# Altium PCB PCB2.PcbDoc
Units mm, origin at the board's own origin, x right, y up, seen from the top; angles counter-clockwise.
Board outline 140 x 90 mm, 2 copper layers (Top Layer, Bottom Layer); 45 components, 39 nets, 156 pads, 21 vias.
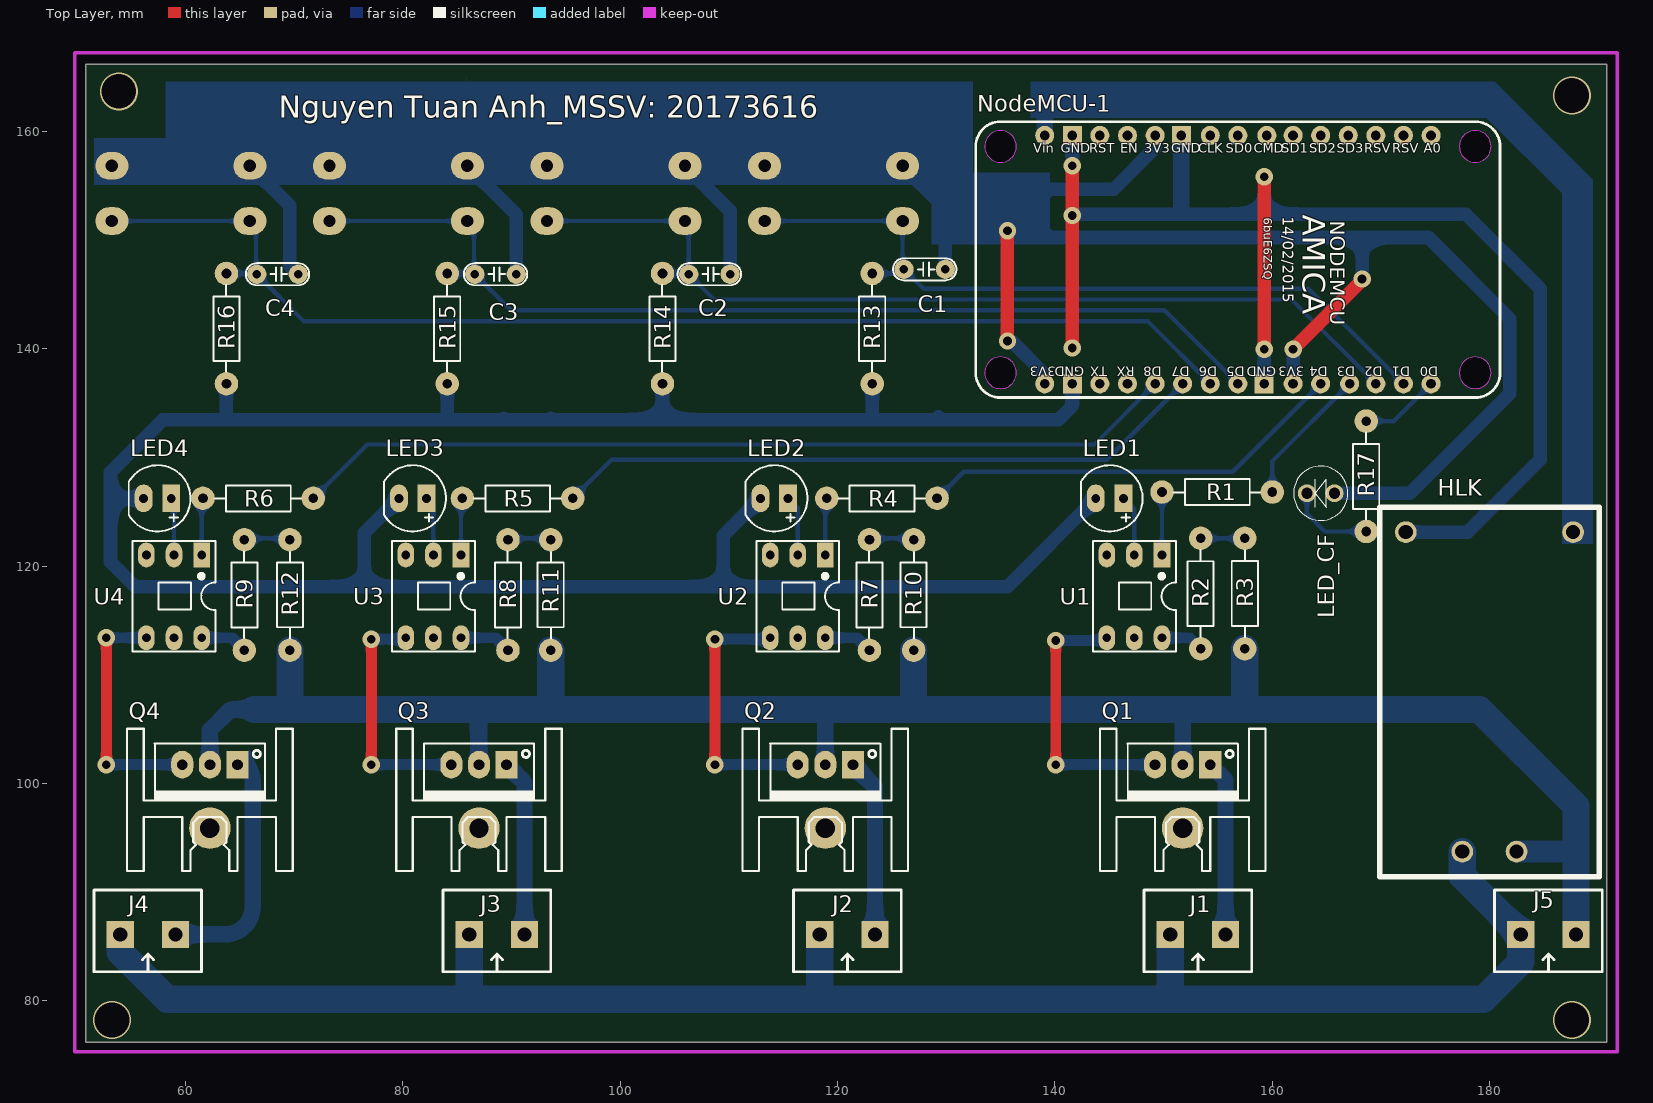
[diagram p0: Top Layer view]
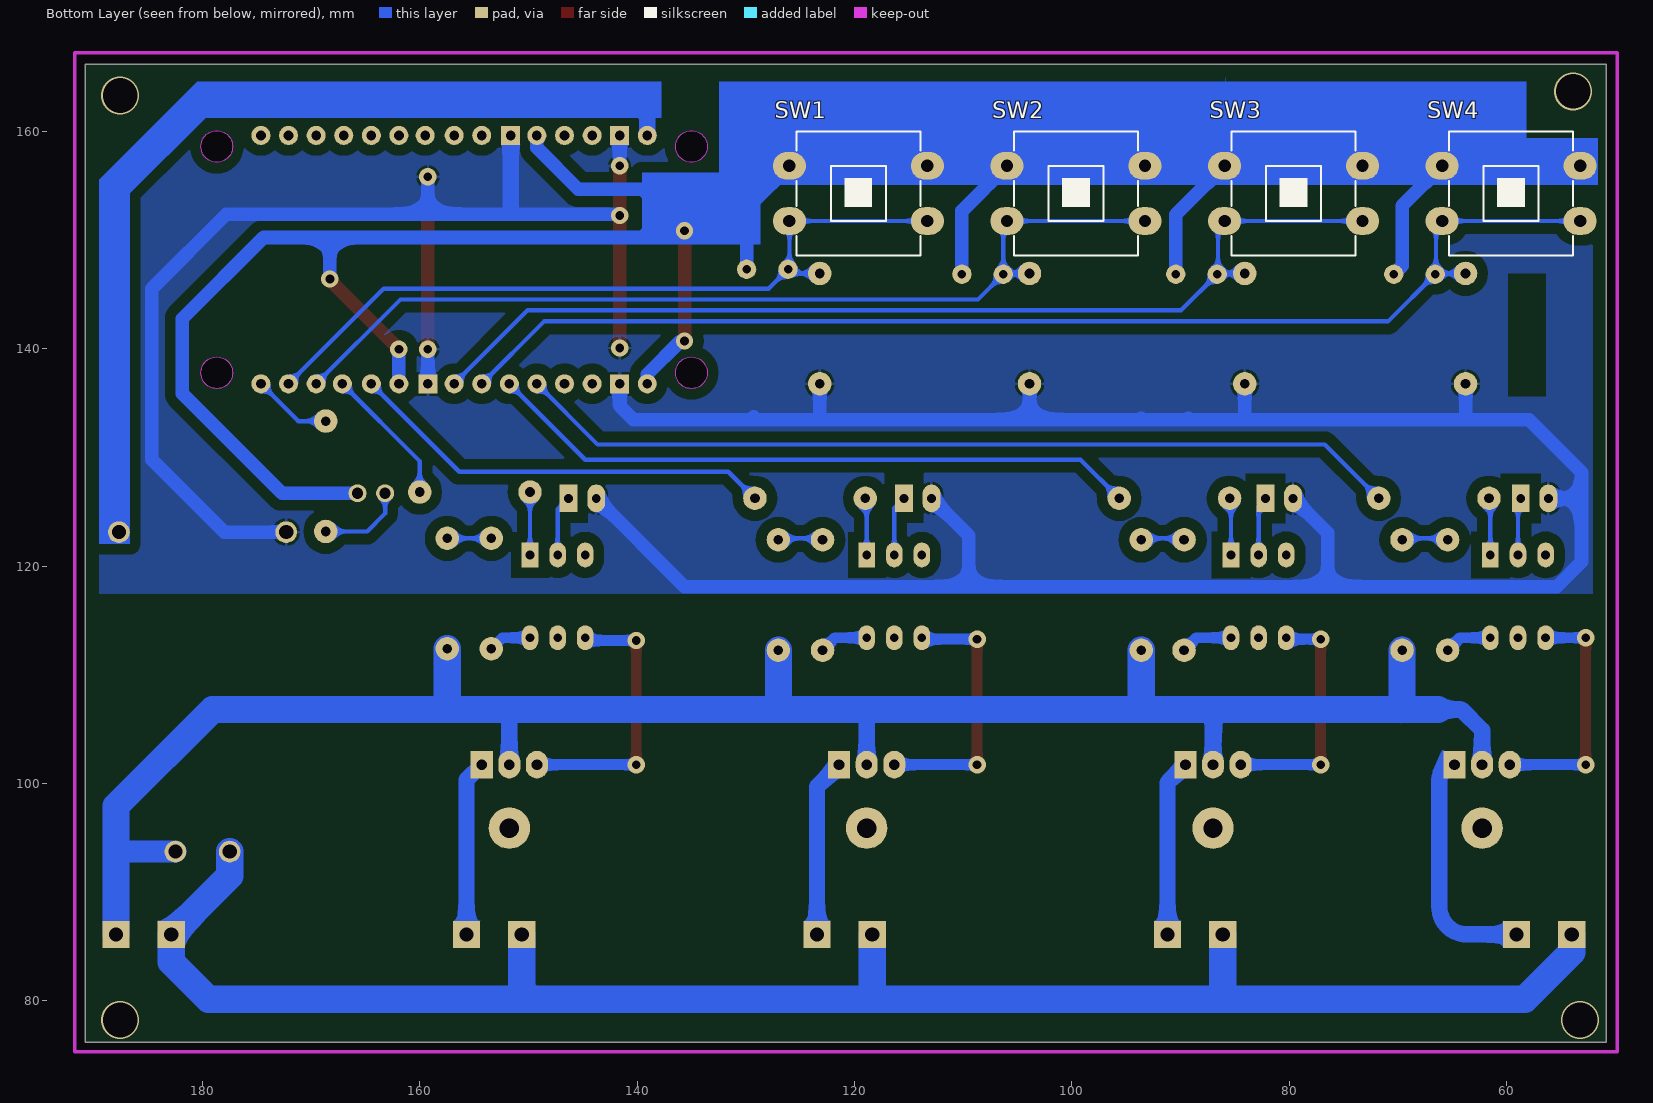
[diagram p1: Bottom Layer view, seen from below]
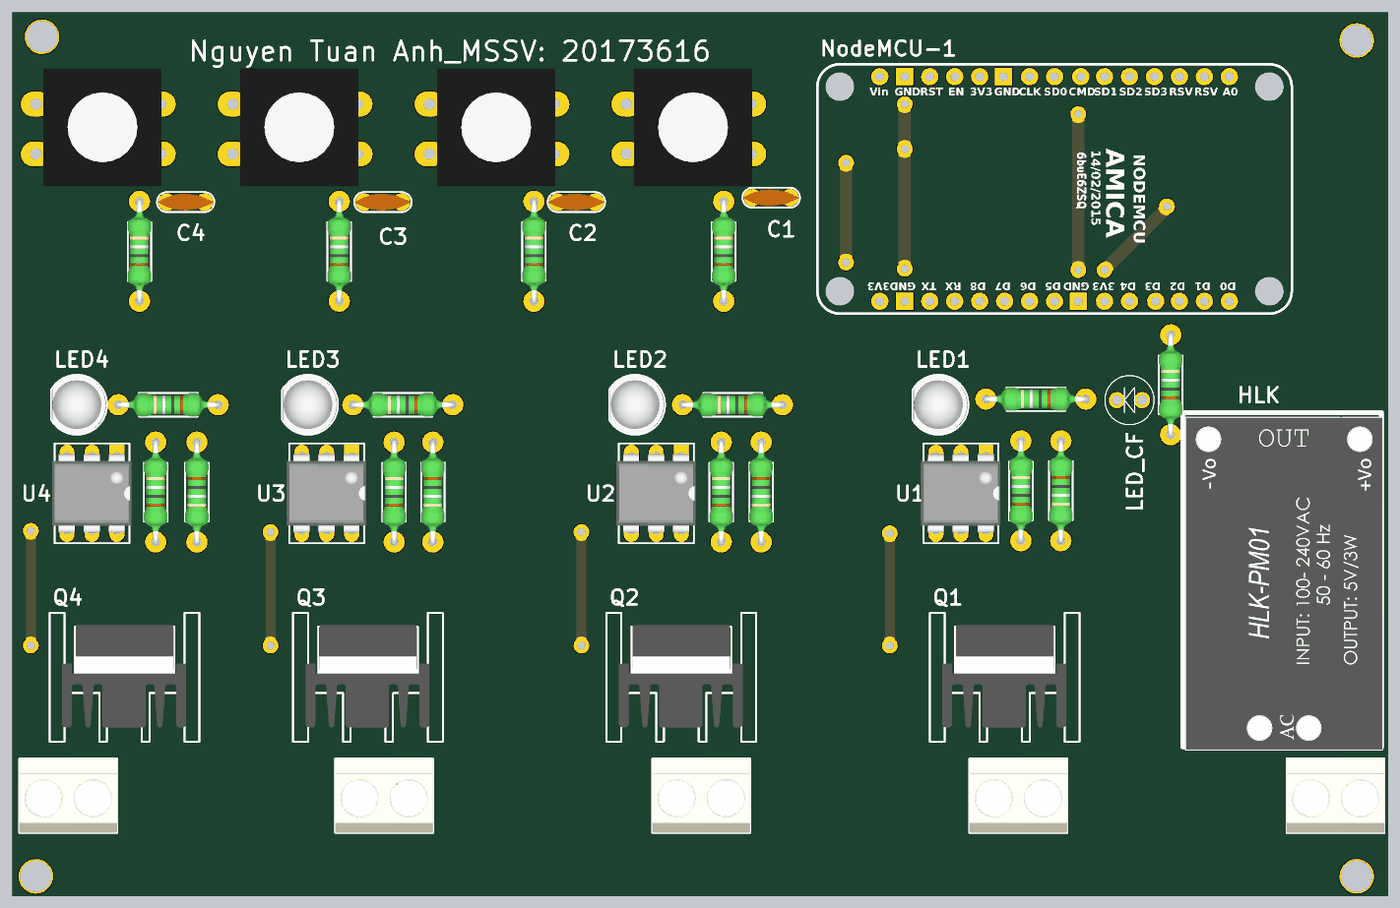
[diagram p2: 3D render of the assembled board from above, using the file's embedded part models]
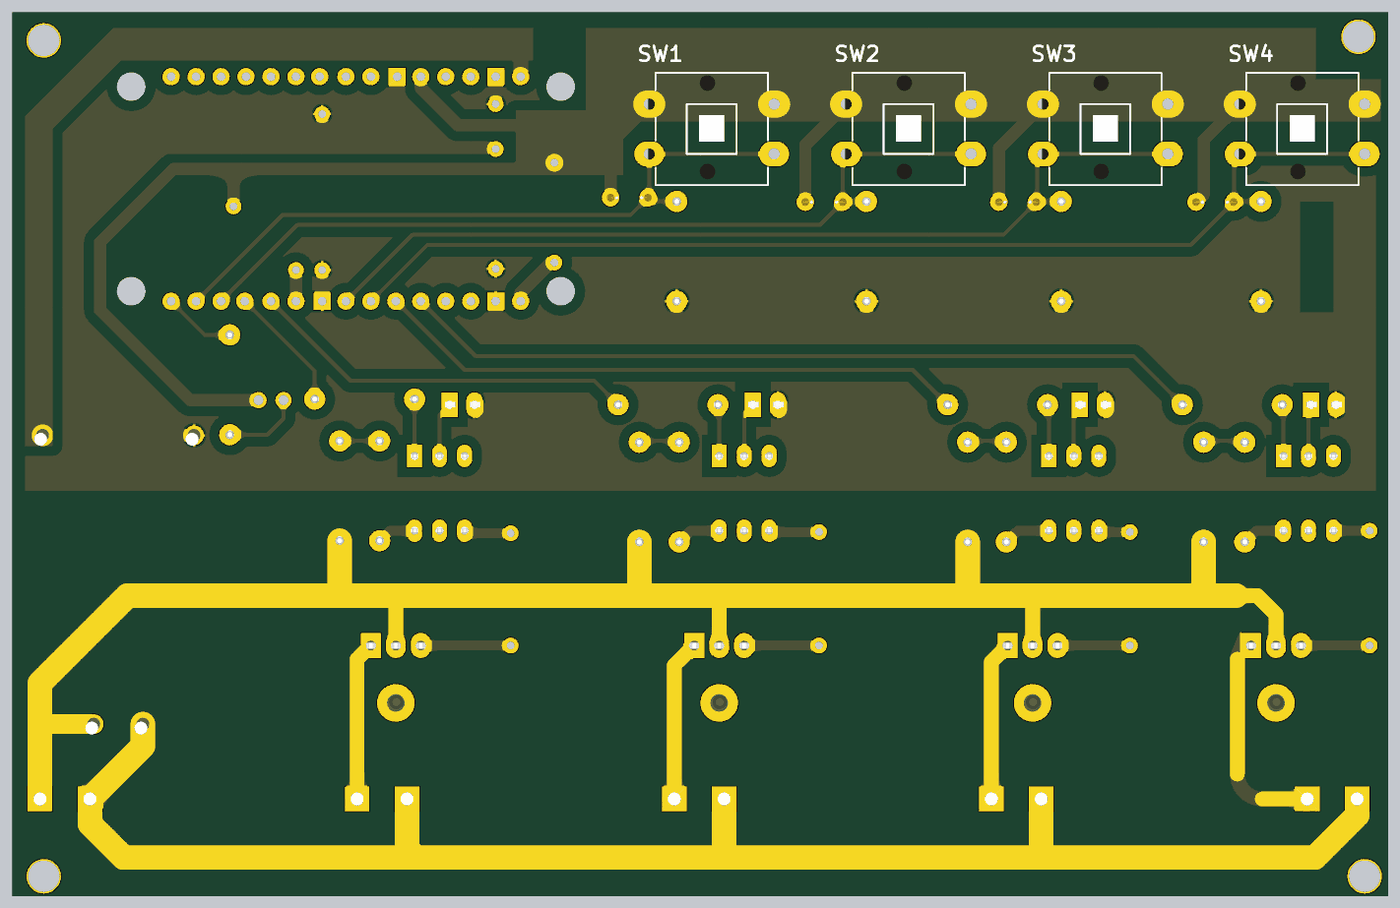
[diagram p3: 3D render of the assembled board from below, using the file's embedded part models]

## Layer stack, top to bottom
Top Solder: solder mask 0.0102, Solder Resist, Dk 3.5
Top Layer: signal copper 0.0356
Dielectric 1: dielectric 0.32, FR-4, Dk 4.8
Bottom Layer: signal copper 0.0356
Bottom Solder: solder mask 0.0102, Solder Resist, Dk 3.5

## Board outline
50.8,76.2 190.8,76.2 190.8,166.2 50.8,166.2

## Design rules (kind name [scope] priority, off if disabled: settings)
Clearance [All] p1: gap=0.3 ignorepadtopadclearanceinfootprint=FALSE
PolygonConnect [All] p1: connectstyle=Relief reliefconductorwidth=0.254 reliefentries=4 polygonreliefangle="90 Angle" airgapwidth=0.254
RoutingVias [All] p1: holewidth=0.8 width=1.6 viastyle="Through Hole" minholewidth=0.711 minwidth=1.27 maxholewidth=2 maxwidth=2
SolderMaskExpansion [All] p1: expansion=0.102
Width pow1 [InNet('3V3') or InNet('GND')  or InNet('5V')] p1: maxlimit=1.5 minlimit=1 preferedwidth=1.25
Width POW [InNet('L_OUT1') or InNet('N_IN')  or InNet('L_IN') or InNet('L_OUT2') or InNet('L_OUT3') or InNet('L_OUT4')] p2: maxlimit=2.5 minlimit=1.5 preferedwidth=2
Width [All] p3: maxlimit=1 minlimit=0.4 preferedwidth=0.6
30 further rules are at their usual default settings.

## Components (designator, comment, footprint, x,y, rotation, side; value= is the part's Value field where it differs from the comment)
C1 "100nF" CN1.5 128.143,147.32 r180 top value=33pF
C2 "100nF" CN1.5 108.331,146.869 r180 top value=33pF
C3 "100nF" CN1.5 88.646,146.869 r180 top value=33pF
C4 "100nF" CN1.5 68.58,146.869 r180 top value=33pF
HLK "5V5W-HLK-PM01" "HLK_PM01 5V3W" 179.999,108.426 r90 top
J1 "KF2" KF2-5.08 153.162,86.106 r180 top
J2 "KF2" KF2-5.08 120.904,86.106 r180 top
J3 "KF2" KF2-5.08 88.646,86.106 r180 top
J4 "KF2" KF2-5.08 56.515,86.106 r180 top
J5 "KF2" KF2-5.08 185.42,86.106 r180 top
LED1 "LED" LED-5-RED 146.304,126.238 r180 top value="LED 3 ly Single Colour"
LED2 "LED" LED-5-RED 115.443,126.238 r180 top value="LED 3 ly Single Colour"
LED3 "LED" LED-5-RED 82.169,126.238 r180 top value="LED 3 ly Single Colour"
LED4 "LED" LED-5-RED 58.674,126.238 r180 top value="LED 3 ly Single Colour"
LED_CF "LED" LED-5MM-BLUE 165.735,126.708 r180 top value="LED 3 ly Single Colour"
NodeMCU-1 "NodeMCU V1.0 ESP-12E" "NodeMCU V1.0 ESP-12E" 180.873,160.934 r270 top locked
Q1 "BTA24-600" TO220H1 151.765,101.727 r180 top
Q2 "BTA12-600" TO220H1 118.872,101.727 r180 top
Q3 "BTA12-600" TO220H1 86.995,101.727 r180 top
Q4 "BTA12-600" TO220H1 62.23,101.727 r180 top
R1 "39R" RES-1/4W 155.321,126.689 r0 top
R2 "180R" RES-1/4W 153.289,117.094 r270 top
R3 "1.2K" RES-1/4W 157.607,117.856 r90 top
R4 "39R" RES-1/4W 124.46,126.111 r0 top
R5 "39R" RES-1/4W 90.932,126.111 r0 top
R6 "39R" RES-1/4W 67.056,126.111 r0 top
R7 "180R" RES-1/4W 122.809,116.967 r270 top
R8 "180R" RES-1/4W 89.535,116.967 r270 top
R9 "180R" RES-1/4W 65.278,116.967 r270 top
R10 "1.2K" RES-1/4W 127.127,117.729 r90 top
R11 "1.2K" RES-1/4W 93.726,117.729 r90 top
R12 "1.2K" RES-1/4W 69.723,117.729 r90 top
R13 "10k" RES-1/4W 123.063,141.478 r270 top
R14 "10k" RES-1/4W 103.759,141.478 r270 top
R15 "10k" RES-1/4W 83.947,141.478 r270 top
R16 "10k" RES-1/4W 63.627,141.478 r270 top
R17 "330R" RES-1/4W 168.529,127.889 r270 top
SW1 "SW" SW4B 125.984,151.765 r180 bottom value="Button chip 4 pin"
SW2 "SW" SW4B 105.96,151.765 r180 bottom value="Button chip 4 pin"
SW3 "SW" SW4B 85.937,151.765 r180 bottom value="Button chip 4 pin"
SW4 "SW" SW4B 65.913,151.765 r180 bottom value="Button chip 4 pin"
U1 "MOC3021M" DIP6 147.193,116.967 r180 top
U2 "MOC3021M" DIP6 116.205,116.967 r180 top
U3 "MOC3021M" DIP6 82.677,116.967 r180 top
U4 "MOC3021M" DIP6 58.801,116.967 r180 top

## Footprints (in the part's own frame and the unit in brackets; to place one, negate y for a bottom-side part, rotate by r counter-clockwise, add the part's x,y. Pads: shape width x height; smd on the part's side, far side on the other; paste and mask are expansions set on the pad)
CN1.5 [mil]
  round 70 hole 31: 1(-70,0) 2(80,0)
  silkscreen extent -110,-40 120,40, body extent -110,-33 120,33, height 235
DIP6 [mil]
  rect 60x90 hole 31.5: 1(-105,-160)
  oval 60x90 hole 31.5: 2(-5,-160) 3(95,-160) 4(95,140) 5(-5,140) 6(-105,140)
  silkscreen extent -155,-210 145,190, body extent -163,-167 155,147, height 170
"HLK_PM01 5V3W" [mm] "THOUGH, AC-DC"
  round 2 hole 1.3: 1(-14.7,2.5) 2(-14.7,-2.5) 3(14.7,7.7) 4(14.7,-7.7)
  silkscreen extent -17,-10.1 17,10.1, body extent -17.4,-10.3 16.6,9.9, height 15.6
KF2-5.08 [mm]
  rect 2.5x2.5 hole 1.3: 1(-2.54,0) 2(2.54,0)
  silkscreen extent -4.95,-4.08 4.95,3.43, body extent -5,-4.07 5,3.43, height 10
LED-5-RED [mil] "LED 2 PIN, 5 ly , Only colour,pin to pin 100mil"
  rect 65x100 hole 32: 1(0,0)
  oval 65x100 hole 32: 2(100,0)
  silkscreen extent -70,-120 154,120, body extent -65,-119 149,118, height 339
LED-5MM-BLUE [mil]
  round 65 hole 40: 1(0,0) 2(100,0)
  silkscreen extent -48,-98 148,98, body extent -54,-105 155,105, height 370
"NodeMCU V1.0 ESP-12E" [mil]
  round 115 hole 115 unplated paste-300 mask-300: 0(91,-86) 0(91,-1806) 0(911,-86) 0(911,-1806)
  round 69 hole 35: 3V3(51,-1246) 3V3(951,-746) 3V3(951,-1646) A0(51,-246) CLK(51,-1046) CMD(51,-841) D0(951,-246) D1(951,-346) D2(951,-446) D3(951,-541) D4(951,-646) D5(951,-946) D6(951,-1046) D7(951,-1146) D8(951,-1246) EN(51,-1346) RST(51,-1446) RSV(51,-346) RSV(51,-446) RX(951,-1346) SD0(51,-946) SD1(51,-746) SD2(51,-646) SD3(51,-546) TX(951,-1446) VIN(51,-1646)
  rect 69x69 hole 35: GND(51,-1151) GND(51,-1546) GND(951,-851) GND(951,-1546)
  Keep-Out Layer circle w2: c91,-86 r57.5
  Keep-Out Layer circle w2: c911,-86 r57.5
  Keep-Out Layer circle w2: c91,-1806 r57.5
  Keep-Out Layer circle w2: c911,-1806 r57.5
  silkscreen extent 1,-1896 1001,4
RES-1/4W [mil]
  round 85 hole 35: 1(-215,5) 2(185,5)
  silkscreen extent -173,-42 141,52, body extent -227,-42 197,52, height 95
SW4B [mil] "SW button 4pin, 450 x 450 mil"
  oval 120x100 hole 45: 1(0,200) 2(500,0) 3(500,200) 4(0,0)
  silkscreen extent 25,-125 475,325, body extent -3,-129 469,343, height 169
TO220H1 [mil] "TO-220 - 1-2-3"
  round 150 hole 70: 0(0,230)
  rect 80x100 hole 39: 1(-100,0)
  oval 80x100 hole 39: 2(0,0) 3(100,0)
  silkscreen extent -300,-130 300,385, body extent -246,-82 250,329, height 1000

## Part data
C1 C2 C3 C4: library part CN
HLK: library part 5V3W-HLK-PM01
J1 J2 J3 J4 J5: Manufacturer="Würth Elektronik eiSos GmbH", partNo=691103110002, ComponentLink1 Description=Manufacturer, ComponentLink1URL=http://www.we-online.com, ComponentLink2 Description=Datasheet, ComponentLink2URL=http://katalog.we-online.de/em/datasheet/6911031100xx.pdf, Created by="Karrer Zheng", Created Date="29 October 2013", NoPins=2
LED1 LED2 LED3 LED4 LED_CF: "LED Single colour Green and Red"
NodeMCU-1: "NodeMCU V1.0 ESP8266 (ESP-12E)"
Q1: library part BTA12-600, "Silicon Bidirectional Triode Thyristor", Code_JEDEC=TO-251-AA, ComponentLink1Description="Manufacturer Link", ComponentLink1URL=http://www.motorola.com/, DatasheetDocument=1999, LatestRevisionDate=17-Jul-2002, LatestRevisionNote="Re-released for DXP Platform.", Note="Pin 2 is electrically connected to Pin 4 (TAB)", PackageReference=369-03, Published=29-Sep-2000, Publisher="Altium Limited"
Q2 Q3 Q4: "Silicon Bidirectional Triode Thyristor", Code_JEDEC=TO-251-AA, ComponentLink1Description="Manufacturer Link", ComponentLink1URL=http://www.motorola.com/, DatasheetDocument=1999, LatestRevisionDate=17-Jul-2002, LatestRevisionNote="Re-released for DXP Platform.", Note="Pin 2 is electrically connected to Pin 4 (TAB)", PackageReference=369-03, Published=29-Sep-2000, Publisher="Altium Limited"
R1 R2 R3 R4 R5 R6 R7 R8 R9 R10 R11 R12 R13 R14 R15 R16 R17: library part Res, "Res", Manufacturer="Generic Components", Class=Passive, Published=08/06/2000, Publisher="Altium Hobart Technology Centre", SubClass=R
SW1 SW2 SW3 SW4: library part SW4, "Switch button 4 pin"

## Via types
v1: diameter 1.6, hole 0.8, Top Layer to Bottom Layer, 17 vias
v2: diameter 3.5, hole 3.2, Top Layer to Bottom Layer, 4 vias

## Nets (pads, with @x,y where several pads share a name; then routed paths per layer and width w, separated by ;. In a path a pad name is that pad's centre, name@x,y a point inside that pad or via, vN(x,y) a via of type N, cw(c..) or ccw(c..) an arc to the next point about the centre after c; other vN are vias at no path point)
3V3: C1.1 C2.1 C3.1 C4.1 LED_CF.1 NodeMCU-1.3V3 SW1.1 SW1.3 SW2.1 SW2.3 SW3.1 SW3.3 SW4.1 SW4.3 | length 301.4
  Top Layer w1.25: v1(135.636,140.716) v1(135.636,150.876) ; v1(161.925,139.954) 168.275,146.304 v1(168.275,146.431)
  Bottom Layer w1: LED_CF.1 LED_CF.1@165.951,126.708
  Bottom Layer w1.25: SW4.3 58.039,156.845 64.135,162.941 66.04,162.941 ; C4.1 69.596,147.631 69.596,153.162 SW4.1 65.913,162.814 66.04,162.941 ; SW3.3 73.237,162.772 73.406,162.941 ; C3.1 90.424,152.358 SW3.1 85.937,162.772 86.106,162.941 ; SW2.3 93.26,162.899 93.218,162.941 ; C2.1 110.109,152.696 SW2.1 105.96,162.856 106.045,162.941 ; SW1.3 113.284,162.56 113.665,162.941 ; C1.1 129.921,152.908 SW1.1 126.619,156.845 128.143,158.369 ; v1(135.636,140.716) 136.017,140.716 139.065,137.668 NodeMCU-1.3V3@139.065,136.779 ; NodeMCU-1.3V3@149.225,159.639 149.225,158.496 145.415,154.686 139.446,154.686 137.259,152.499 ; NodeMCU-1.3V3@161.925,136.779 v1(161.925,139.954) ; LED_CF.1@165.951,126.708 172.682,126.708 181.864,135.89 181.864,142.762 174.378,150.248 168.275,150.248 ; v1(168.275,146.431) 168.275,150.248 ; 66.04,162.941 73.406,162.941 ; 73.406,162.941 86.106,162.941 ; 86.106,162.941 93.218,162.941 ; 93.218,162.941 106.045,162.941 ; 106.045,162.941 113.665,162.941 ; 113.665,162.941 123.571,162.941 128.143,158.369 ; 128.143,158.369 v1(135.636,150.876) 137.259,152.499 ; 137.259,152.499 139.509,150.248 168.275,150.248
5V: HLK.4 NodeMCU-1.VIN | length 86.6
  Bottom Layer w1.5: NodeMCU-1.VIN 139.065,161.417 141.478,163.83 178.308,163.83 187.699,154.439 HLK.4
D0: NodeMCU-1.D0 R17.1 | length 7.4
  Bottom Layer w0.4: R17.1 171.196,133.35 NodeMCU-1.D0
D1: C1.2 NodeMCU-1.D1 R13.1 SW1.2 SW1.4 | length 70.6
  Bottom Layer w0.4: SW1.2 SW1.4 125.984,147.447 C1.2 ; R13.1 125.73,146.939 C1.2 ; NodeMCU-1.D1 163.322,145.542 127.889,145.542 C1.2
D2: C2.2 NodeMCU-1.D2 R14.1 SW2.2 SW2.4 | length 87.6
  Bottom Layer w0.4: SW2.2 SW2.4 106.299,151.426 C2.2 ; R14.1 106.229,146.939 C2.2 ; NodeMCU-1.D2 161.782,144.542 108.626,144.542 C2.2
D3: NodeMCU-1.D3 R1.2 | length 12.9
  Bottom Layer w0.4: R1.2 160.02,129.667 NodeMCU-1.D3
D4: NodeMCU-1.D4 R4.2 | length 39.7
  Bottom Layer w0.4: R4.2 131.616,128.695 156.381,128.695 NodeMCU-1.D4
D5: C3.2 NodeMCU-1.D5 R15.1 SW3.2 SW3.4 | length 94.8
  Bottom Layer w0.4: SW3.2 SW3.4 86.544,151.158 C3.2@86.544,146.939 ; R15.1 C3.2@86.544,146.939 ; NodeMCU-1.D5 150.082,143.542 89.941,143.542 C3.2 C3.2@86.544,146.939
D6: C4.2 NodeMCU-1.D6 R16.1 SW4.2 SW4.4 | length 112.5
  Bottom Layer w0.4: SW4.2 SW4.4 66.478,151.2 C4.2@66.478,146.939 ; R16.1 C4.2@66.478,146.939 ; NodeMCU-1.D6 148.562,142.522 70.894,142.522 C4.2 C4.2@66.478,146.939
D7: NodeMCU-1.D7 R5.2 | length 60.5
  Bottom Layer w0.4: R5.2 99.187,129.794 144.78,129.794 NodeMCU-1.D7
D8: NodeMCU-1.D8 R6.2 | length 81.8
  Bottom Layer w0.4: R6.2 76.708,131.191 143.637,131.191 NodeMCU-1.D8
GND: HLK.3 LED1.2 LED2.2 LED3.2 LED4.2 NodeMCU-1.GND R13.2 R14.2 R15.2 R16.2 | length 357.8
  Top Layer w1.25: v1(141.605,140.081) v1(141.605,152.273) v1(141.605,156.845) ; v1(159.258,139.954) v1(159.258,155.829)
  Bottom Layer w1.25: LED4.2 53.086,126.238 ; R16.2 63.754,133.604 63.627,133.477 ; LED3.2 76.454,123.063 76.454,118.11 ; R15.2 84.074,133.731 83.82,133.477 ; 89.281,133.604 89.408,133.477 ; 93.599,133.604 93.472,133.477 ; R14.2 103.886,133.477 ; LED2.2 109.474,122.809 109.474,118.11 ; R13.2 123.19,133.604 123.317,133.477 ; 129.286,133.731 129.54,133.477 ; NodeMCU-1.GND@141.605,136.779 141.605,134.747 140.335,133.477 129.54,133.477 ; v1(141.605,152.273) 141.725,152.393 159.258,152.393 ; v1(141.605,156.845) NodeMCU-1.GND@141.605,159.639 ; LED1.2 135.636,118.11 109.474,118.11 ; NodeMCU-1.GND@159.258,136.779 v1(159.258,139.954) ; v1(159.258,155.829) 159.258,152.393 ; HLK.3 177.99,123.126 184.658,129.794 184.658,145.542 177.807,152.393 159.258,152.393 ; 53.086,126.238 53.086,120.396 55.372,118.11 76.454,118.11 ; 53.086,126.238 53.086,128.651 57.912,133.477 63.627,133.477 ; 63.627,133.477 83.82,133.477 ; 76.454,118.11 109.474,118.11 ; 83.82,133.477 89.408,133.477 ; 89.408,133.477 93.472,133.477 ; 93.472,133.477 103.886,133.477 ; 103.886,133.477 123.317,133.477 ; 123.317,133.477 129.54,133.477
  Bottom Layer w1.5: 151.638,153.162 NodeMCU-1.GND@151.638,159.639
L_IN: HLK.2 J5.1 Q1.2 Q2.2 Q3.2 Q4.2 R3.1 R10.1 R11.1 R12.1 | length 187
  Bottom Layer w1.5: Q4.2 62.23,104.902 64.135,106.807 66.294,106.807 ; Q3.2 86.995,106.807 ; Q2.2 118.872,106.68 ; Q1.2 151.765,106.553 152.019,106.807
  Bottom Layer w2: HLK.2 187.706,93.726 187.96,93.472
  Bottom Layer w2.5: 66.294,106.807 69.723,106.807 ; R12.1 69.596,106.934 69.723,106.807 ; R11.1 93.599,106.934 93.726,106.807 ; R10.1 127,106.934 127.127,106.807 ; 157.48,107.95 R3.1 ; J5.1 187.96,93.472 187.96,97.917 179.07,106.807 152.019,106.807 127.127,106.807 ; 69.723,106.807 86.995,106.807 93.726,106.807 ; 93.726,106.807 127.127,106.807
L_OUT1: J1.1 Q1.1 | length 16.2
  Bottom Layer w1.5: Q1.1 155.702,100.33 J1.1
L_OUT2: J2.1 Q2.1 | length 16.5
  Bottom Layer w1.5: Q2.1 123.444,99.695 J2.1
L_OUT3: J3.1 Q3.1 | length 16.3
  Bottom Layer w1.5: Q3.1 91.186,100.076 J3.1
L_OUT4: J4.1 Q4.1 | length 22.4
  Bottom Layer w1.5: J4.1 63.627,86.106 ccw(c63.627,88.646) 66.167,88.646 66.167,100.33 ccw(c64.77,100.33) Q4.1
N_IN: HLK.1 J1.2 J2.2 J3.2 J4.2 J5.2 | length 164.5
  Bottom Layer w2.5: J4.2 53.975,84.455 58.293,80.137 86.233,80.137 ; J3.2 86.106,80.264 86.233,80.137 ; J2.2 118.364,80.264 118.491,80.137 ; J1.2 150.622,81.026 149.733,80.137 ; HLK.1 177.499,91.487 J5.2 182.88,83.566 179.451,80.137 149.733,80.137 ; 86.233,80.137 118.491,80.137 ; 118.491,80.137 149.733,80.137
NetLED1_1: LED1.1 U1.2 | length 5.6
  Bottom Layer w0.4: LED1.1 147.32,125.222 U1.2
NetLED2_1: LED2.1 U2.2 | length 5.6
  Bottom Layer w0.4: LED2.1 116.332,125.349 U2.2
NetLED3_1: LED3.1 U3.2 | length 5.5
  Bottom Layer w0.4: LED3.1 82.804,125.603 U3.2
NetLED4_1: LED4.1 U4.2 | length 5.3
  Bottom Layer w0.4: LED4.1 58.928,125.984 U4.2
NetLED_CF_2: LED_CF.2 R17.2 | length 8.5
  Bottom Layer w0.4: LED_CF.2 163.195,124.841 164.846,123.19 R17.2 R17.2@168.656,123.67
NetQ1_3: Q1.3 U1.4 | length 25.4
  Top Layer w1: v1(140.081,101.727) v1(140.081,113.157)
  Bottom Layer w1: v1(140.081,101.727) Q1.3 ; v1(140.081,113.157) 144.526,113.157 U1.4
NetQ2_3: Q2.3 U2.4 | length 24.3
  Top Layer w1: v1(108.712,101.727) v1(108.712,113.284)
  Bottom Layer w1: v1(108.712,101.727) Q2.3 ; v1(108.712,113.284) 113.665,113.284 U2.4
NetQ3_3: Q3.3 U3.4 | length 22.2
  Top Layer w1: v1(77.089,101.727) v1(77.089,113.284)
  Bottom Layer w1: v1(77.089,101.727) Q3.3 ; v1(77.089,113.284) 80.137,113.284 U3.4
NetQ4_3: Q4.3 U4.4 | length 22.4
  Top Layer w1: v1(52.705,101.727) v1(52.705,113.411)
  Bottom Layer w1: v1(52.705,101.727) Q4.3 ; v1(52.705,113.411) U4.4
NetR1_1: R1.1 U1.1 | length 5.8
  Bottom Layer w0.4: U1.1 R1.1
NetR2_1: R2.1 R3.2 | length 4.1
  Bottom Layer w0.4: R2.1 R3.2
NetR2_2: R2.2 U1.6 | length 4
  Bottom Layer w1: U1.6 152.4,113.411 R2.2
NetR4_1: R4.1 U2.1 | length 5
  Bottom Layer w0.4: U2.1 R4.1@118.872,125.984
NetR5_1: R5.1 U3.1 | length 5
  Bottom Layer w0.4: U3.1 R5.1@85.344,125.984
NetR6_1: R6.1 U4.1 | length 5
  Bottom Layer w0.4: U4.1 R6.1@61.468,125.984
NetR7_1: R7.1 R10.2 | length 4.4
  Bottom Layer w0.4: R7.1@122.682,122.555 R10.2@127.127,122.555
NetR7_2: R7.2 U2.6 | length 4.5
  Bottom Layer w1: U2.6 121.793,113.411 R7.2
NetR8_1: R8.1 R11.2 | length 4.3
  Bottom Layer w0.4: R8.1@89.408,122.555 R11.2@93.726,122.555
NetR8_2: R8.2 U3.6 | length 4.8
  Bottom Layer w1: U3.6 88.519,113.411 R8.2
NetR9_1: R9.1 R12.2 | length 4.6
  Bottom Layer w0.4: R9.1@65.151,122.555 R12.2@69.723,122.555
NetR9_2: R9.2 U4.6 | length 4.4
  Bottom Layer w1: U4.6 64.262,113.411 R9.2
pads on no net: NodeMCU-1.0 NodeMCU-1.A0 NodeMCU-1.CLK NodeMCU-1.CMD NodeMCU-1.EN NodeMCU-1.RST NodeMCU-1.RSV NodeMCU-1.RX NodeMCU-1.SD0 NodeMCU-1.SD1 NodeMCU-1.SD2 NodeMCU-1.SD3 NodeMCU-1.TX Q1.0 Q2.0 Q3.0 Q4.0 U1.3 U1.5 U2.3 U2.5 U3.3 U3.5 U4.3 U4.5
copper on no net:
  other v2: 53.213,78.232 187.579,78.232 187.579,163.322 53.848,163.703

## Polygon pours and split planes (outlines as drawn)
GND on Bottom Layer "Bottom Layer-No Net" (solid, remove dead copper, pour order 0): 52.07,165.354 52.07,117.475 189.484,117.475 189.484,165.354

## Keep-outs
Keep-Out Layer:
  lines w0.3: 49.784,75.311 191.77,75.311 191.77,167.259 49.784,167.259 49.784,75.311

## Other copper
Bottom Layer:
  rectangle net 3V3: 51.562,155.067 58.42,159.385
  rectangle net 3V3: 128.651,149.606 139.573,156.21
  rectangle net 3V3: 58.166,155.067 132.461,164.592
  region net 5V: 137.795,164.592 137.795,161.29 179.705,161.29 186.69,154.305 186.69,122.047 189.484,122.047 189.484,155.575 180.467,164.592

## Silkscreen, mask and mechanical layers (free items; w line width, h text height)
Top Overlay:
  text "Nguyen Tuan Anh_MSSV: 20173616" at 68.58,161.29 h2

## Text inside footprints (layer, text, board x,y; h text height)
NodeMCU-1: Top Overlay "GND" at 150.698,157.734 h1.52; Top Overlay "3V3" at 148.234,157.734 h1.52; Top Overlay "EN" at 146.025,157.734 h1.52; Top Overlay "RST" at 143.18,157.734 h1.52; Top Overlay "GND" at 140.564,157.734 h1.52; Top Overlay "Vin" at 138.024,157.734 h1.52; Top Overlay "D7" at 152.394,138.684 h1.52 r180; Top Overlay "D8" at 149.857,138.684 h1.52 r180; Top Overlay "RX" at 147.344,138.684 h1.52 r180; Top Overlay "TX" at 144.831,138.684 h1.52 r180; Top Overlay "GND" at 142.717,138.684 h1.52 r180; Top Overlay "3V3" at 140.081,138.684 h1.52 r180; Top Overlay "D6" at 154.962,138.684 h1.52 r180; Top Overlay "CMD" at 158.289,157.734 h1.52; Top Overlay "D0" at 175.285,138.684 h1.52 r180; Top Overlay "D1" at 172.711,138.684 h1.52 r180; Top Overlay "D2" at 170.165,138.684 h1.52 r180; Top Overlay "D3" at 167.625,138.684 h1.52 r180; Top Overlay "D4" at 165.125,138.684 h1.52 r180; Top Overlay "3V3" at 162.966,138.684 h1.52 r180; Top Overlay "GND" at 160.376,138.684 h1.52 r180; Top Overlay "D5" at 157.48,138.684 h1.52 r180; Top Overlay "A0" at 173.939,157.734 h1.52; Top Overlay "RSV" at 171.044,157.734 h1.52; Top Overlay "RSV" at 168.493,157.734 h1.52; Top Overlay "SD3" at 165.942,157.734 h1.52; Top Overlay "SD2" at 163.391,157.734 h1.52; Top Overlay "SD1" at 160.84,157.734 h1.52; Top Overlay "SD0" at 155.738,157.734 h1.52; Top Overlay "CLK" at 153.187,157.734 h1.52; Top Overlay "6buE6ZSQ" at 159.207,152.07 h0.76 r270; Top Overlay "NODEMCU" at 164.897,151.79 h2.29 r270; Top Overlay "AMICA" at 162.103,152.324 h3.56 r270; Top Overlay "14/02/2015" at 160.604,152.171 h1.75 r270